# EAGLE board InterfacingBoardV2 (EAGLE 9.6.2)
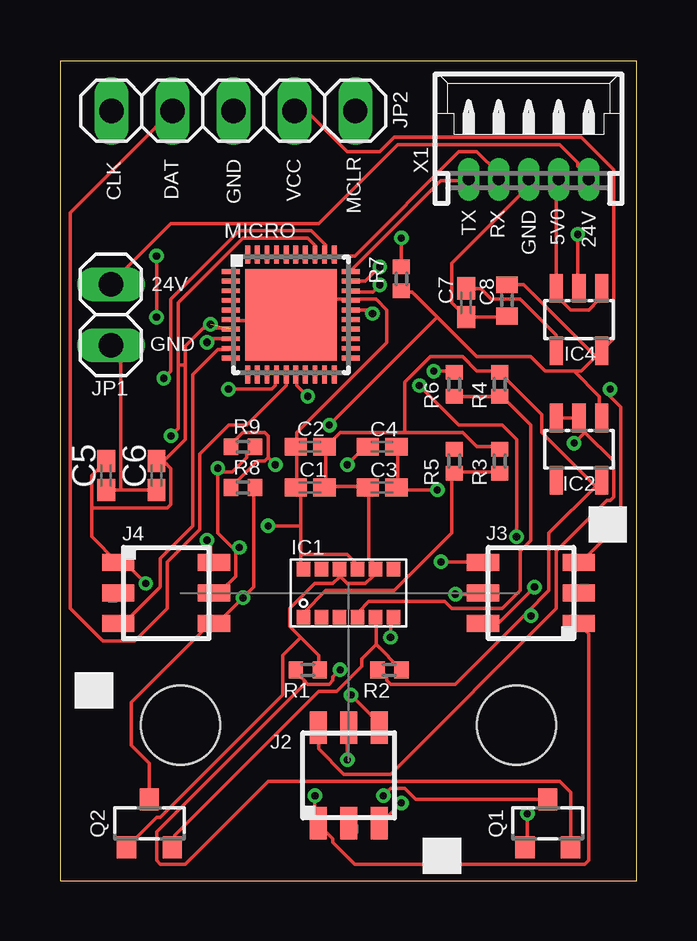
[diagram p0: board, top side]
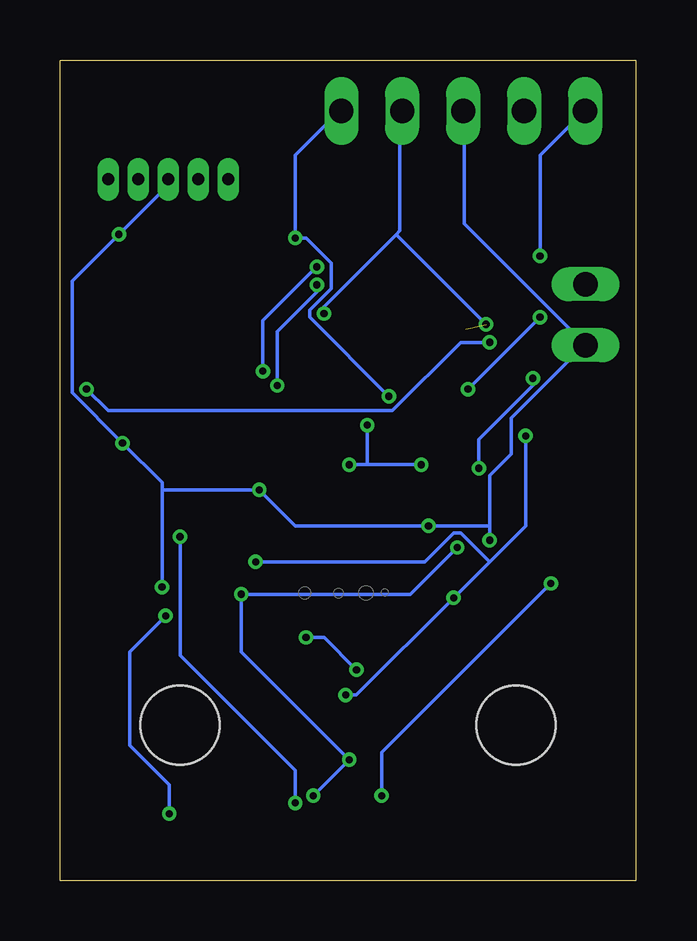
[diagram p1: board, bottom side, seen from below]

Size 24 x 34.2 mm. Coordinates in mm from the lower left corner, seen from the top.
Outline: 0,0 0,34.2 24,34.2 24,0 0,0
Copper layers (1+2*15+16): Top 0.035mm / dielectric 0.38mm / Route2 0.035mm / dielectric 0.71mm / Route15 0.035mm / dielectric 0.38mm / Bottom 0.035mm
Design rules "PCB-POOL Standard_ML4": minimum track width 0.15mm, minimum drill 0.3mm, track to track 0.15mm, track to pad 0.15mm, pad to pad 0.15mm, via to via 0.15mm, smd to smd 0.15mm, copper to edge 0.3mm, drill to drill 0.2mm, minimum pad ring 0.2mm, minimum via ring 0.15mm, stop-mask expansion 0.03mm, vias tented up to drill 0mil, thermal gap 0.2mm
Holes 3.3 mm at 5,6.5 19,6.5

## Footprints (pad centres in the part's own frame; a part is rotated, then mirrored left to right if it is on the bottom)
C0402K = smd 0.925 x 0.74: 1 -0.6,0; 2 0.6,0
C0402 = smd 0.7 x 0.9: 1 -0.65,0; 2 0.65,0
VL6180X = smd 0.55 x 0.6: 1 -1.875,-1; 2 -1.125,-1; 3 -0.375,-1; 4 0.375,-1; 5 1.125,-1; 6 1.875,-1; 7 1.875,1; 8 1.125,1; 9 0.375,1; 10 -0.375,1; 11 -1.125,1; 12 -1.875,1
SOT25 = smd 0.55 x 1.2: 1 -0.95,-1.3; 2 0,-1.3; 3 0.95,-1.3; 4 0.95,1.3; 5 -0.95,1.3
CLP-103-02-F-DH = smd 0.711 x 1.346: 1 1.27,-1.994; 2 1.27,1.994; 3 0,-1.994; 4 0,1.994; 5 -1.27,-1.994; 6 -1.27,1.994
1X02 = drill 1.016 long: 1 -1.27,0; 2 1.27,0
1X05 = drill 1.016 long: 1 -5.08,0; 2 -2.54,0; 3 0,0; 4 2.54,0; 5 5.08,0
UQFN40ML5X5MM = smd 0.75 x 0.2: 1 -2.5,1.8; 2 -2.5,1.4; 3 -2.5,1; 4 -2.5,0.6; 5 -2.5,0.2; 6 -2.5,-0.2; 7 -2.5,-0.6; 8 -2.5,-1; 9 -2.5,-1.4; 10 -2.5,-1.8; 21 2.5,-1.8; 22 2.5,-1.4; 23 2.5,-1; 24 2.5,-0.6; 25 2.5,-0.2; 26 2.5,0.2; 27 2.5,0.6; 28 2.5,1; 29 2.5,1.4; 30 2.5,1.8 | smd 0.2 x 0.75: 11 -1.8,-2.5; 12 -1.4,-2.5; 13 -1,-2.5; 14 -0.6,-2.5; 15 -0.2,-2.5; 16 0.2,-2.5; 17 0.6,-2.5; 18 1,-2.5; 19 1.4,-2.5; 20 1.8,-2.5; 31 1.8,2.5; 32 1.4,2.5; 33 1,2.5; 34 0.6,2.5; 35 0.2,2.5; 36 -0.2,2.5; 37 -0.6,2.5; 38 -1,2.5; 39 -1.4,2.5; 40 -1.8,2.5 | smd 3.8 x 3.8: TH 0,0
SOT23 = smd 0.8 x 0.9: 1 -0.95,-1; 2 0.95,-1; 3 0,1
R0402 = smd 0.6 x 0.7: 1 -0.5,0; 2 0.5,0
53048-05 = drill 0.5 pad 0.698 long: 1 2.5,-1.25; 2 1.25,-1.25; 3 0,-1.25; 4 -1.25,-1.25; 5 -2.5,-1.25

## Placement (x,y rotation side)
C1  0.1uF  [C0402K]  10.4,16.4 180 top
C2  4.7uF  [C0402K]  10.4,18.1 180 top
C3  4.7uF  [C0402K]  13.4,16.4 0 top
C4  1uF  [C0402K]  13.4,18.1 0 top
C5  0.1uF  [C0402K]  1.9,16.9 90 top
C6  0.1uF  [C0402K]  4,16.9 90 top
C7  470pF  [C0402K]  16.9,24.1 270 top
C8  2.2uF  [C0402]  18.6,24.2 270 top
IC1  VL6180X  [VL6180X]  12,12 0 top
IC2  TS5205  [SOT25]  21.6,18 180 top
IC4  TS520533  [SOT25]  21.6,23.4 180 top
J2  CLP-103-02-F-DH  [CLP-103-02-F-DH]  12,4.4 0 top
J3  CLP-103-02-F-DH  [CLP-103-02-F-DH]  19.6,12 90 top
J4  CLP-103-02-F-DH  [CLP-103-02-F-DH]  4.4,12 270 top
JP1  [1X02]  2.1,23.6 270 top
JP2  [1X05]  7.2,32.1 180 top
MICRO  PIC16F19175  [UQFN40ML5X5MM]  9.6,23.6 0 top
Q1  BSS138  [SOT23]  20.3,2.4 0 top
Q2  BSS138  [SOT23]  3.7,2.4 0 top
R1  10k  [R0402]  10.3,8.8 0 top
R2  10k  [R0402]  13.7,8.8 180 top
R3  47k  [R0402]  18.3,17.5 90 top
R4  47k  [R0402]  18.3,20.7 90 top
R5  1k  [R0402]  16.4,17.5 90 top
R6  1k  [R0402]  16.4,20.7 90 top
R7  10k  [R0402]  14.2,25.1 270 top
R8  10k  [R0402]  7.6,16.4 180 top
R9  10k  [R0402]  7.6,18.1 180 top
X1  53048-05  [53048-05]  19.5,30.5 0 top

## Library data of the parts
C1-C8 = rcl; SPICEPREFIX: C
IC1 = st-microelectronics-vl6180x
IC2 IC4 = v-reg
J2-J4 = con-samtec2
JP1 JP2 = pinhead
MICRO = microchip
Q1 Q2 = bss138_10; MF: Fairchild; MPN: BSS138; OC_FARNELL: 9845330; OC_NEWARK: 67R2009
R1-R9 = rcl; SPICEPREFIX: R
X1 = con-molex; MF: MOLEX; MPN: 53048-0510; OC_FARNELL: 9732926; OC_NEWARK: 57H4722

## Nets
24V: JP1.1 X1.1
+3V3: C1.1 C2.1 C3.1 IC1.8 IC1.10 IC2.5 Q1.1 Q2.1 R1.2 R2.2 R3.2 R4.2
GND: C1.2 C2.2 C3.2 C4.2 C5.1 C6.1 C7.2 C8.2 IC1.9 IC1.12 IC2.2 IC2.3 IC4.2 J2.6 J3.6 J4.6 JP1.2 JP2.3 MICRO.6 MICRO.27 MICRO.TH X1.3
GPIO0/CE_1: MICRO.29 R6.2
GPIO0/CE_2: J2.1 MICRO.28
GPIO0/CE_3: J3.1 MICRO.8
GPIO0/CE_4: J4.1 MICRO.9
GPIO1_1: R5.2
ICSPCLK: JP2.5 MICRO.14
ICSPDAT: JP2.4 MICRO.15
MCLR: JP2.1 MICRO.16 R7.1
N$1: IC1.1 R3.1 R5.1
N$2: IC1.4 R4.1 R6.1
N$3: C7.1 IC4.4
RC0-TX: MICRO.30 X1.5
RC1-RX: MICRO.31 X1.4
SCL: J2.2 J3.2 J4.2 MICRO.33 Q2.3 R8.1
SCL_2_8V: IC1.5 Q2.2 R2.1
SDA: J2.4 J3.4 J4.4 MICRO.32 Q1.3 R9.1
SDA_2_8V: IC1.6 Q1.2 R1.1
VCC: C4.1 C5.2 C6.2 C8.1 IC2.1 IC4.5 J2.5 J3.5 J4.5 JP2.2 MICRO.7 MICRO.26 R7.2 R8.2 R9.2
VCC_5V: IC4.1 IC4.3 X1.2

## Tracks (layer width: path | path; a pad name or v marks a point on that pad's centre or on a via)
24V
  Top 0.15: X1.1 22,29.35 21.55,29.8 21.55,29.95 20.8,30.7 14.05,30.7 10.75,27.4 4.6,27.4 2.2,25 JP1.1
+3V3  (via drill 0.3)
  Top 0.15: 19.45,11.2 20.35,12.1 20.35,14.5 22.3,16.45 | 19.45,11.2 16.45,8.2 13.75,8.2 13.6,8.35 13.6,8.5 13.3,8.8 R2.2 | 22.3,16.45 IC2.5 22.45,16.6 | 22.3,16.45 20.05,18.7 20.05,19.45 R4.2 18.25,21.25 17.35,21.25 16.75,21.85 15.4,21.85 14.35,20.8 14.35,18.7 | v19.45,2.8 19.45,1.45 Q1.1 | 19.45,11.2 v19.6,11.05 | 14.35,18.7 11.65,18.7 11.05,18.1 | 14.35,18.7 16.75,18.7 17.35,18.1 18.25,18.1 R3.2 | 11.05,18.1 11.05,16.45 | 11.05,18.1 C2.1 | 11.05,16.45 12.7,16.45 C3.1 12.85,16.3 12.85,13.45 13,13.3 13,13 | 11.05,16.45 C1.1 | 11.65,12.7 11.65,13 IC1.10 | 11.65,12.7 11.95,12.4 12.7,12.4 13,12.7 13,13 | 10,10.15 9.55,10.6 9.55,11.35 10.6,12.4 11.35,12.4 11.65,12.7 | 10,10.15 10.75,9.4 10.75,8.8 R1.2 | Q2.1 4,2.65 4.15,2.65 9.25,7.75 9.25,9.4 10,10.15 | 13,13 IC1.8
  Bottom 0.15: v19.45,2.8 19.45,4 21.1,5.65 21.1,9.55 v19.6,11.05
GND  (via drill 0.3)
  Top 0.15: 10,14.8 10,16.15 9.85,16.3 C1.2 9.85,16.45 9.85,18.1 | 10,14.8 10,13.6 | 10,13.6 10,13 IC1.12 | 10,13.6 11.95,13.6 12.25,13.3 12.25,13 IC1.9 | MICRO.6 7.15,23.35 9.4,23.35 9.55,23.5 MICRO.TH 9.7,23.65 10.3,24.25 12.1,24.25 | 9.85,18.1 9.85,18.7 13.6,22.45 13.6,23.8 13.15,24.25 12.1,24.25 | 9.85,18.1 C2.2 | 12.1,24.25 MICRO.27 | C6.1 2.5,16.3 | 2.5,16.3 C5.1 | v6.1,14.2 6.25,14.05 6.25,13.3 J4.6 | 2.5,16.3 2.5,22 2.2,22.3 JP1.2 | v8.65,14.8 10,14.8 | IC2.3 IC2.2 21.7,19.3 21.7,18.85 21.85,18.7 | 21.85,18.7 23.05,17.5 23.05,16 22.9,15.85 22.75,15.85 20.65,13.75 20.65,11.35 13.75,4.45 11.8,4.45 10.75,5.5 10.75,6.25 J2.6 | C8.2 18.55,23.5 C7.2 16.3,24.1 16.3,25.75 19.45,28.9 19.45,29.2 X1.3 | C4.2 14.05,18.1 14.05,16.45 C3.2 14.05,16.3 v15.7,16.3 | v21.55,26.95 21.55,24.7 IC4.2 | v19.75,12.25 18.25,10.75 17.65,10.75 J3.6 | v21.4,18.25 21.85,18.7
  Bottom 0.15: 6.1,14.8 6.1,16.9 5.2,17.8 5.2,19.3 2.2,22.3 JP1.2 2.2,22.45 7.15,27.4 7.15,32.05 JP2.3 | 6.1,14.8 v6.1,14.2 | 6.1,14.8 v8.65,14.8 14.2,14.8 v15.7,16.3 19.75,16.3 | X1.3 19.6,29.2 19.6,28.9 v21.55,26.95 23.5,25 23.5,20.35 v21.4,18.25 19.75,16.6 19.75,16.3 | 19.75,16.3 v19.75,12.25
GPIO0/CE_1  (via drill 0.3)
  Top 0.15: v15.55,21.25 16.3,21.25 R6.2 | v13.3,25.6 12.7,25 MICRO.29
  Bottom 0.15: v15.55,21.25 15.55,23.35 v13.3,25.6
GPIO0/CE_2  (via drill 0.3)
  Top 0.15: v13.3,24.85 13,24.55 12.1,24.55 MICRO.28 | v14.95,20.65 16.6,19 18.4,19 19,18.4 v19,14.35 | v14.2,3.25 13.3,2.35 J2.1
  Bottom 0.15: v13.3,24.85 13.3,24.55 14.95,22.9 v14.95,20.65 | v19,14.35 19,9.4 14.2,4.6 v14.2,3.25
GPIO0/CE_3  (via drill 0.3)
  Top 0.15: MICRO.8 6.25,22.6 v6.1,22.45 | v22.9,20.5 22.9,20.2 23.35,19.75 23.35,14.95 21.7,13.3 J3.1
  Bottom 0.15: v6.1,22.45 7.3,22.45 10.15,19.6 22,19.6 v22.9,20.5
GPIO0/CE_4
  Top 0.15: MICRO.9 7,22.15 6.55,22.15 5.5,21.1 5.5,14.8 4.15,13.45 4.15,12.25 2.5,10.6 J4.1
ICSPCLK  (via drill 0.3)
  Top 0.15: v7,20.5 8.8,20.5 8.95,20.65 8.95,21.1 MICRO.14 | v4,26.05 v4,23.5
  Bottom 0.15: v4,23.5 v7,20.5 | v4,26.05 4,30.25 2.2,32.05 JP2.5
ICSPDAT
  Top 0.15: MICRO.15 9.4,20.65 7.75,19 7,19 5.8,17.8 5.8,14.65 4.45,13.3 4.45,11.35 3.1,10 1.75,10 0.4,11.35 0.4,27.85 4.6,32.05 JP2.4
MCLR  (via drill 0.3)
  Top 0.15: v14.2,26.8 R7.1 | v10.3,20.2 9.85,20.65 9.85,21.1 MICRO.16
  Bottom 0.15: JP2.1 12.4,32.05 14.2,30.25 v14.2,26.8 13.75,26.8 12.7,25.75 12.7,24.7 13.6,23.8 13.6,23.5 v10.3,20.2
N$1
  Top 0.15: IC1.1 10.15,11.05 10.15,11.2 11.05,12.1 13.9,12.1 16.3,14.5 16.3,16.9 R5.1 16.45,17.05 18.25,17.05 R3.1
N$2
  Top 0.15: IC1.4 12.4,11.05 12.4,11.2 12.85,11.65 16,11.65 16.3,11.35 18.4,11.35 19.15,12.1 19.15,13.75 19.6,14.2 19.6,19 18.4,20.2 R4.1 R6.1
N$3
  Top 0.15: C7.1 17.5,24.7 17.95,24.25 19.15,24.25 20.65,22.75 IC4.4
RC0-TX
  Top 0.15: MICRO.30 12.1,25.45 15.85,29.2 16.9,29.2 X1.5
RC1-RX
  Top 0.15: X1.4 18.25,29.5 17.35,30.4 16.6,30.4 12.25,26.05 11.35,26.05 MICRO.31
SCL  (via drill 0.3)
  Top 0.15: R8.1 8.05,16.3 8.05,12.25 v7.6,11.8 6.4,10.6 J4.2 6.25,10.75 2.95,7.45 2.95,5.65 3.7,4.9 Q2.3 | MICRO.33 10.6,26.5 10.3,26.8 7.6,26.8 4.9,24.1 4.9,21.5 4.9,18.85 v4.6,18.55 | v12.1,7.75 13.15,6.7 13.15,6.4 J2.2 | v15.85,13.3 17.5,13.3 J3.2
  Top 0.152: 4.9,21.5 5.1,21.5
  Bottom 0.15: v4.6,18.55 4.6,14.8 6.1,13.3 | 6.1,13.3 v7.6,11.8 11.65,7.75 v12.1,7.75 | v15.85,13.3 8.8,13.3 7.6,14.5 7.3,14.5 6.1,13.3
SCL_2_8V
  Top 0.15: 13.15,9.85 13.15,10.9 IC1.5 | R2.1 13.15,9.85 | 13.15,9.85 12.55,9.25 12.55,8.95 11.5,7.9 10.75,7.9 4.75,1.9 4.75,1.45 Q2.2
SDA  (via drill 0.3)
  Top 0.15: Q1.3 14.8,3.4 14.35,3.85 13.75,3.85 v13.45,3.55 | v11.95,5.05 11.95,6.25 J2.4 | v16.45,11.95 17.5,11.95 J3.4 | 6.7,17.05 7.15,17.05 7.75,17.65 7.75,17.8 8.05,18.1 R9.1 | 6.7,17.05 6.55,16.9 6.55,14.5 7.3,13.75 | 7.3,13.75 7.3,12.7 6.7,12.1 6.4,12.1 J4.4 | v4.3,20.95 4.6,21.25 4.6,24.25 7.45,27.1 10.45,27.1 11.05,26.5 11.05,26.2 MICRO.32 | 6.7,17.05 v6.55,17.2 | 7.3,13.75 v7.45,13.9
  Bottom 0.15: v13.45,3.55 v11.95,5.05 16.45,9.55 v16.45,11.95 9.4,11.95 v7.45,13.9 | v4.3,20.95 4.3,20.65 6.55,18.4 v6.55,17.2
SDA_2_8V  (via drill 0.3)
  Top 0.15: v13.75,10.15 13.75,10.9 IC1.6 | v11.65,8.8 11.35,8.5 11.35,8.35 11.2,8.2 10.3,8.2 10.15,8.35 | 10.15,8.35 9.7,8.8 R1.1 | Q1.2 21.25,3.7 20.8,4.15 8.65,4.15 5.2,0.7 4.15,0.7 4,0.85 4,2.05 10.15,8.2 10.15,8.35
  Bottom 0.15: v13.75,10.15 13,10.15 v11.65,8.8
VCC  (via drill 0.3)  (1 unrouted)
  Top 0.15: J3.5 21.7,10.6 22,10.3 22,0.85 21.85,0.7 12.25,0.7 11.35,1.6 11.35,1.75 10.75,2.35 J2.5 10.6,2.5 v10.6,3.55 | C5.2 1.3,16.9 1.3,15.55 | 1.3,15.55 1.3,14.35 2.35,13.3 J4.5 2.5,13.15 2.8,13.15 v3.55,12.4 | 4.3,17.5 5.2,18.4 5.2,22.3 5.95,23.05 6.25,23.05 7,23.05 MICRO.7 | 1.3,15.55 4.45,15.55 4.6,15.7 4.6,17.2 4.3,17.5 | 4.3,17.5 C6.2 | MICRO.26 12.85,23.8 v13,23.65 | R8.2 8.2,17.5 8.5,17.5 8.65,17.65 | 8.65,17.65 8.65,18.55 8.5,18.7 7.6,18.7 7,18.1 R9.2 | v11.95,17.35 12.7,18.1 C4.1 | 8.65,17.65 v8.95,17.35 | 15.7,23.5 17.35,21.85 19.6,21.85 20.2,21.25 21.4,21.25 | 15.7,23.5 14.65,24.55 14.2,24.55 R7.2 | 21.4,21.25 21.7,21.25 22.3,21.85 | IC4.5 22.3,21.85 | C8.1 19.3,24.85 22.3,21.85 | 22.45,22 IC4.5 | 21.4,21.25 22.45,20.2 22.45,19.3 IC2.1 | 15.7,23.5 v11.2,19 | IC4.5 23.05,22.6 23.05,29.65 21.7,31 13.9,31 13.3,30.4 11.95,30.4 10.3,32.05 9.85,32.05 JP2.2
  Bottom 0.15: v13,23.65 13,23.95 10,26.95 | 10,26.95 9.85,27.1 9.85,32.05 JP2.2 | v8.95,17.35 11.2,17.35 | 11.2,17.35 v11.95,17.35 | v11.2,19 11.2,17.35 | 10,26.95 v6.25,23.2 | v10.6,3.55 10.6,5.35 v3.55,12.4
VCC_5V
  Top 0.15: IC4.1 22.45,24.7 22.45,24.25 22,23.8 21.25,23.8 20.65,24.4 IC4.3 20.65,29.2 X1.2

## Text on the board
tPlace: CLK | DAT | GND | VCC | MCLR | TX | RX | 5V0 | GND | 24V | 24V | GND